# Altium PCB IMD_project.PcbDoc
Units mil, origin at the board's own origin, x right, y up, seen from the top; angles counter-clockwise.
Board outline 2362.2 x 2362.2 mil, 2 copper layers (Top Layer, Bottom Layer); 28 components, 20 nets, 83 pads, 0 vias.
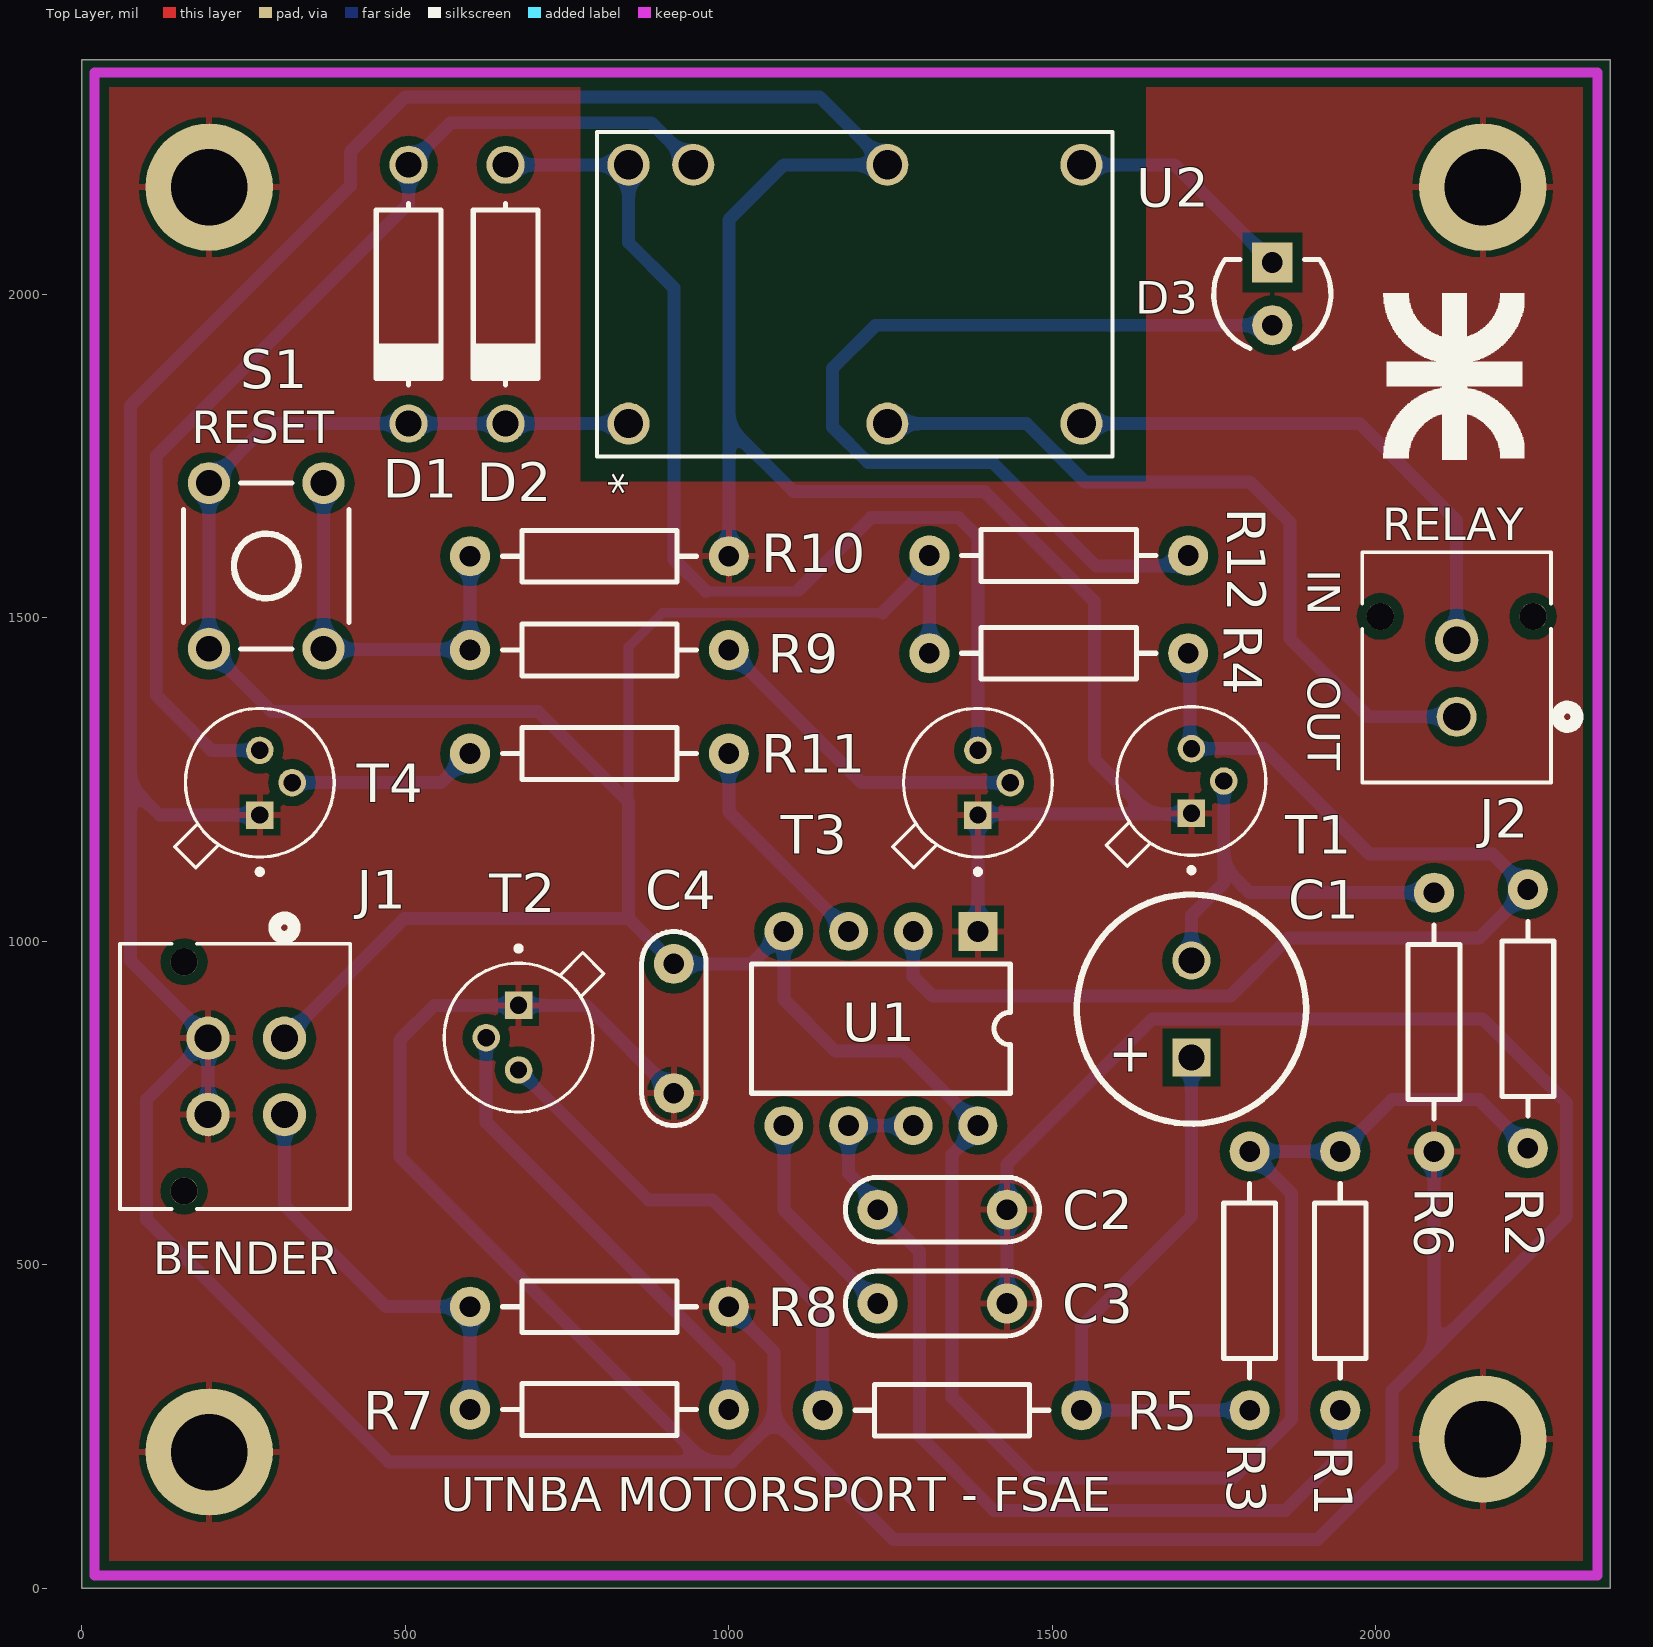
[diagram p0: Top Layer view]
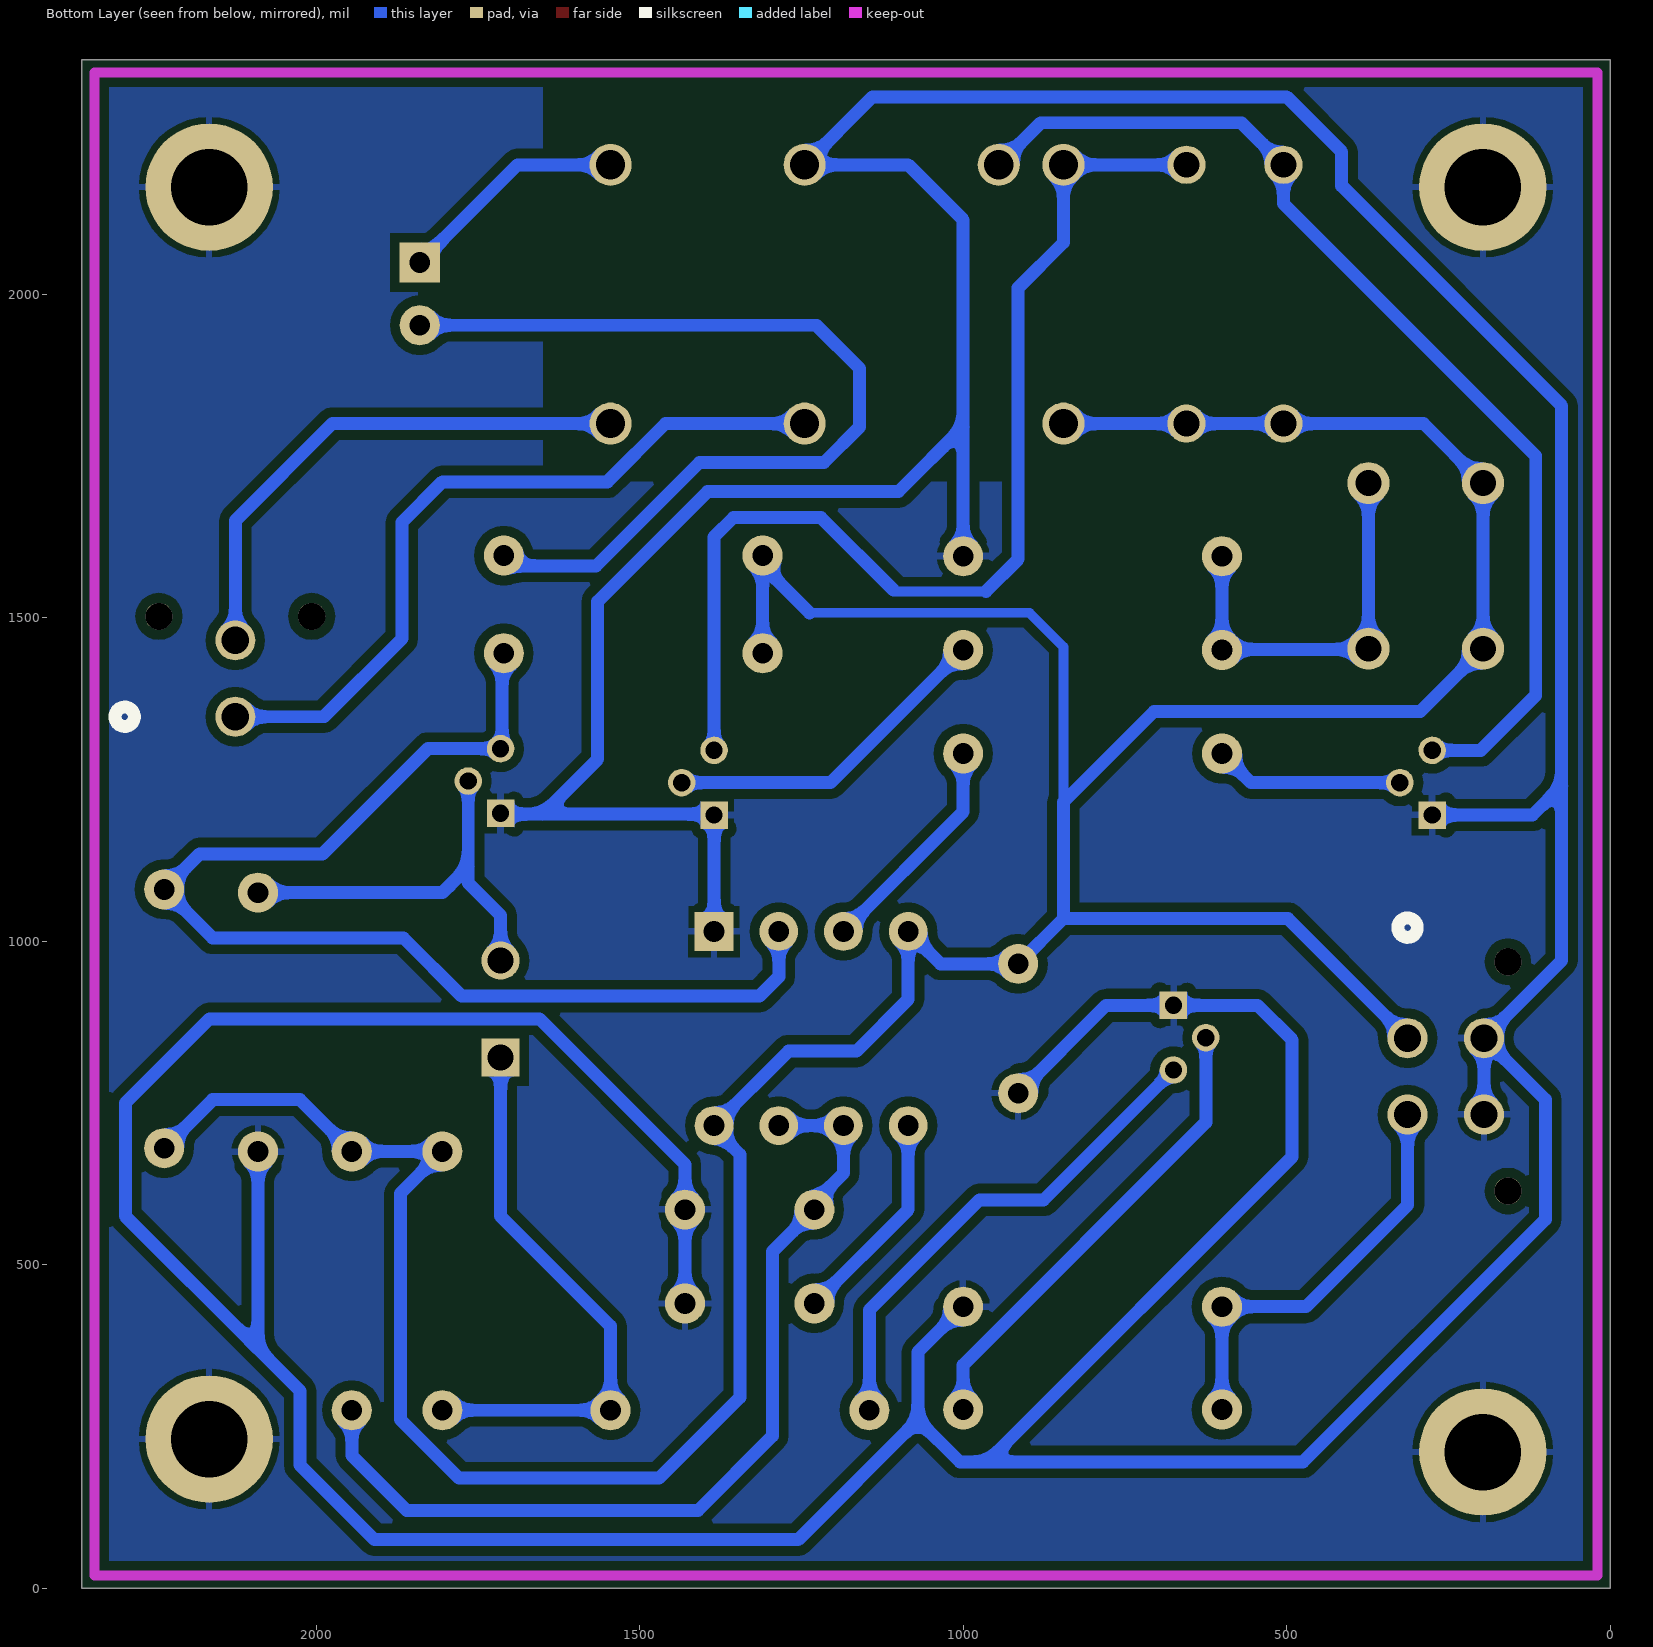
[diagram p1: Bottom Layer view, seen from below]
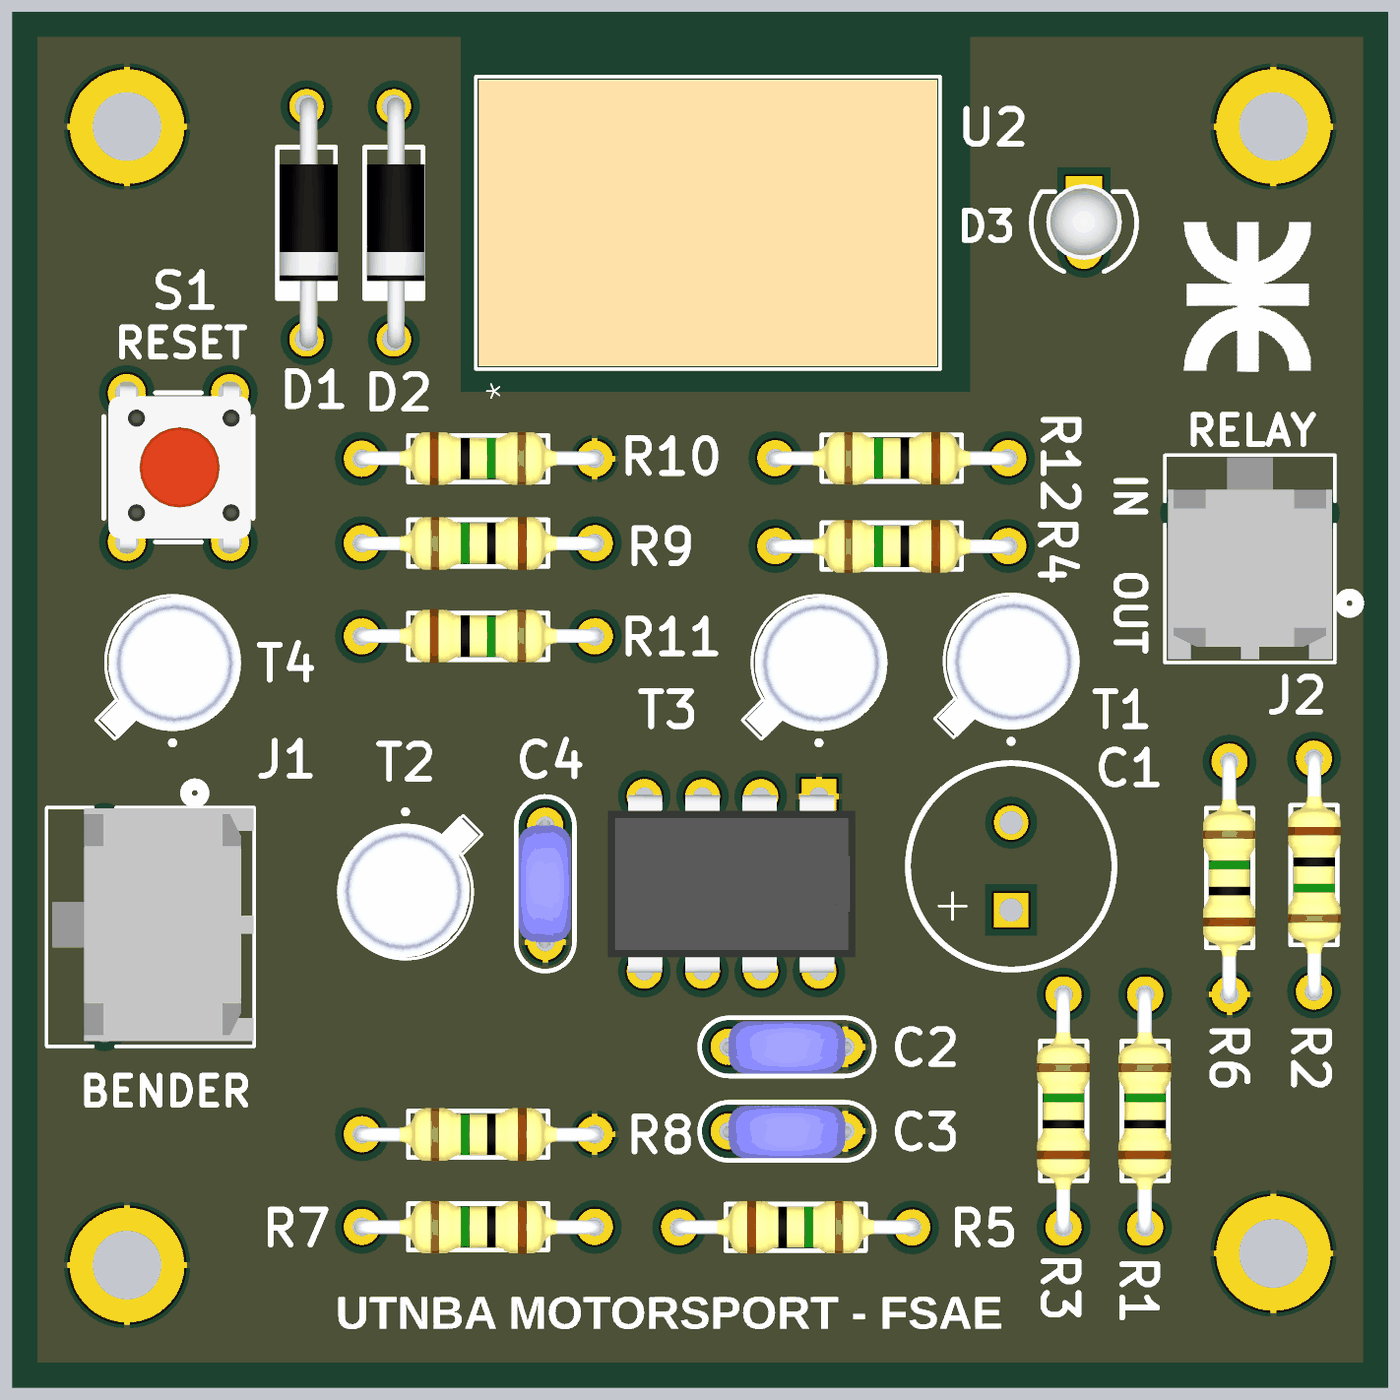
[diagram p2: 3D render of the assembled board from above, using the file's embedded part models]

## Layer stack, top to bottom
Top Solder: solder mask 0.4, Solder Resist, Dk 3.5
Top Layer: signal copper 1.4
Dielectric 1: dielectric 12.6, FR-4, Dk 4.8
Bottom Layer: signal copper 1.4
Bottom Solder: solder mask 0.4, Solder Resist, Dk 3.5

## Board outline
0,0 0,2362.2 2362.2,2362.2 2362.2,0

## Design rules (kind name [scope] priority, off if disabled: settings)
Clearance [All] p1: gap=15 ignorepadtopadclearanceinfootprint=FALSE
PolygonConnect [All] p1: connectstyle=Relief reliefconductorwidth=10 reliefentries=4 polygonreliefangle="90 Angle" airgapwidth=10
RoutingVias [All] p1: holewidth=28 width=50 viastyle="Through Hole" minholewidth=28 minwidth=50 maxholewidth=28 maxwidth=50
SolderMaskExpansion [All] p1: expansion=4 istentingtop=FALSE
Width [All] p1: maxlimit=35 minlimit=10 preferedwidth=20
30 further rules are at their usual default settings.

## Components (designator, comment, footprint, x,y, rotation, side; value= is the part's Value field where it differs from the comment)
C1 "100uF" CAP300RP 1715,895 r90 top
C2 "10uF" CAP200 1330,585 r0 top
C3 "10nF" CAP200 1330,440 r0 top
C4 "10nF" CAP200 915,865 r270 top
D1 "1N4001" DO41 505,2000 r270 top
D2 "1N4001" DO41 655,2000 r270 top
D3 "STATUS LED" "LED 3 - Red" 1840,2000 r90 top
J1 "BENDER" CONN_SD-44067-001_04_MOL 313.11,850 r90 top
J2 "RELE" CONN_SD-44067-001_02_MOL 2125,1346.89 r0 top
R1 "10K" RES400 1945,275 r90 top
R2 "1K" RES400 2235,1080 r270 top
R3 "1K" RES400 1805,275 r90 top
R4 "1K" RES400 1710,1445 r180 top
R5 "1K" RES400 1145,275 r0 top
R6 "10K" RES400 2090,675 r90 top
R7 "1K" RES400 1000,276 r180 top
R8 "2K2" RES400 1000,435 r180 top
R9 "1K" RES400 1000,1450 r180 top
R10 "10K" RES400 600,1595 r0 top
R11 "1K" RES400 600,1290 r0 top
R12 "1K" RES400 1710,1596 r180 top
S1 "TACT SWITCH" TACTSWITCH 285,1580 r0 top
T1 "2N2222" TO-18 1715,1247.5 r90 top
T2 "2N2222" TO-18 675,850.9 r270 top
T3 "2N2222" TO-18 1385,1245 r90 top
T4 "2N2222" TO-18 275,1245 r90 top
U1 "LM555" DIP8 1385,1015 r270 top
U2 "DK1A1B-L2-12V" RELAY_DK2A_L2_PAN 845,1800 r90 top

## Footprints (in the part's own frame and the unit in brackets; to place one, negate y for a bottom-side part, rotate by r counter-clockwise, add the part's x,y. Pads: shape width x height; smd on the part's side, far side on the other; paste and mask are expansions set on the pad)
CAP200 [mil]
  round 62 hole 32: 1(-100,0) 2(100,0)
  silkscreen extent -150,-50 150,50, body extent -110,-46 110,44, height 246
CAP300RP [mm]
  rect 1.5x1.5 hole 1.016: 1(-1.905,0)
  round 1.5 hole 1.016: 2(1.905,0)
  silkscreen extent -4.5,-4.5 4.5,4.5
CONN_SD-44067-001_02_MOL [mil]
  round 62 hole 42 paste-31 mask+0: 1(0,0)
  round 66.93 / inner round 62 / far side round 62 hole 42 paste-31 mask+0: 2(0,118.11)
  round 42 hole 42 unplated paste+0 mask+0: 3(-118.11,155.12) 4(118.11,155.12)
  silkscreen extent -146,-102 186,254, body extent -141,-96 141,250, height 391
CONN_SD-44067-001_04_MOL [mm]
  round 1.7 / inner round 1.575 / far side round 1.575 hole 1.067 paste-0.787 mask+0: 1(0,0) 2(-3,0) 3(0,3) 4(-3,3)
  round 1.067 hole 1.067 unplated paste+0 mask+0: 5(-6,3.94) 6(3,3.94)
  silkscreen extent -6.71,-2.59 4.72,6.46, body extent -6.47,-2.57 3.68,6.23, height 9.42
DIP8 [mil]
  rect 60x60 hole 32: 1(0,0)
  round 60 hole 32: 2(0,-100) 3(0,-200) 4(0,-300) 5(300,-300) 6(300,-200) 7(300,-100) 8(300,0)
  silkscreen extent 50,-350 250,50, body extent -3,-363 303,63, height 177
DO41 [mm]
  round 1.5 hole 1.016: 1(-5.08,0) 2(5.08,0)
  silkscreen extent -3.56,-1.27 3.56,1.27, body extent -5.46,-1.19 5.46,1.37, height 2.03
"LED 3 - Red" [mil]
  round 62 hole 32: 1(-48,0)
  rect 62x62 hole 32: 2(49,0)
  silkscreen extent -84,-90 54,90, body extent -64,-65 66,65, height 237
RELAY_DK2A_L2_PAN [mil]
  round 65 hole 45 paste-32.5 mask+0: 1(0,0) 3(0,-400) 4(0,-700) 5(400,-700) 6(400,-400) 7(400,-100) 8(400,0)
  silkscreen extent -51,-748 451,49, body extent -46,-743 446,44, height 394
RES400 [mil]
  round 62 hole 32: 1(0,0) 2(400,0)
  silkscreen extent 50,-40 350,40, body extent -12,-45 412,46, height 96
TACTSWITCH [mil]
  round 65 hole 40: 1(-88.58,-127.95) 2(-88.58,127.95) 3(88.58,-127.95) 4(88.58,127.95)
  silkscreen extent -128,-128 128,128, body extent -120,-156 124,156, height 276
TO-18 [mm]
  round 1.08 hole 0.68: 1(0,-1.27) 2(1.27,0)
  rect 1.08x1.08 / inner round 1.08 / far side rect 1.08x1.08 hole 0.68: 3(-1.27,0)
  silkscreen extent -3.6,-2.92 2.92,3.34, body extent -3.3,-2.99 2.87,3.17, height 5.31

## Part data
C1: library part CAPPOL
C2 C3 C4: library part CAP
D1 D2: "Diodo"
D3: library part "LED ROJO", "LED ROJO"
J1: library part "MolexMini 4", "Molex mini 40 de 4 pines (347920040)", Package=None, Availability=Unavailable, MP=347920040, Price=None
J2: library part "MolexMini 2", "Micro-Fit 3.0 Wire-to-Board Header, Dual Row, Vertical for up to 3.56mm Thick PCB, 2 Circuits, Tin (Sn) Plating", Manufacturer_Name="Molex Connector Corporation", Manufacturer_Part_Number=440670201, Copyright="Copyright (C) 2025 Ultra Librarian. All rights reserved.", RefDes=RefDes, Type=Type
R1 R2 R3 R4 R5 R6 R7 R8 R9 R10 R11 R12: library part RES
T1 T2 T3 T4: library part "TRANSISTOR NPN"
U1: "Timer"
U2: "Description", Manufacturer_Name=Panasonic, Copyright="Copyright (C) 2026 Ultra Librarian. All rights reserved.", Manufacturer_Part_Number=DK1A1B-L2-12V, RefDes=RefDes, Type=Type

## Free pads (board coordinates)
  round 196.85 hole 118.11: 2(196.85,210.35) 2(196.85,2165.35) 2(2165.35,230.37) 2(2165.35,2165.35)

## Nets (pads, with @x,y where several pads share a name; then routed paths per layer and width w, separated by ;. In a path a pad name is that pad's centre, name@x,y a point inside that pad or via, vN(x,y) a via of type N, cw(c..) or ccw(c..) an arc to the next point about the centre after c; other vN are vias at no path point)
GND: C2.2 C3.2 C4.2 J1.3 J1.4 pad.2 R6.1 R8.1 R10.2 T1.3 T2.3 T3.3 T4.3 U1.1 U2.6 | length 11466.4
  Bottom Layer w20: J1.4 J1.3 ; T4.3 120,1195 75,1240 ; C4.2 779.1,900.9 T2.3 545,900.9 491.56,847.45 491.56,666.56 963.11,195 ; R8.1 1070,365 1070,260 ; R10.2 1000,1795 ; U1.1 T3.3 1386.25,1196.25 1650,1196.25 ; C3.2 C2.2 1430,655 1655,880 2165,880 2295,750 2295,575 2090,370 ; T1.3 1713.75,1196.25 1650,1196.25 ; R6.1 2090,370 ; 75,1240 75,970 J1.3 ; 75,1240 75,1827.52 415,2167.52 415,2220 500,2305 1140,2305 U2.6 1085,2200 1000,2115 1000,1795 ; J1.3 100,755 100,570 475,195 963.11,195 ; 963.11,195 1005,195 1070,260 ; 1000,1795 1100,1695 1395,1695 1565,1525 1565,1281.25 1650,1196.25 ; 1070,260 1255,75 1910,75 2025,190 2025,305 2090,370
NetC1_1: C1.1 R3.1 R5.2 | length 875.4
  Bottom Layer w20: C1.1 1715,575 1545,405 R5.2 R3.1
NetC1_2: C1.2 R6.2 T1.1 | length 649.4
  Bottom Layer w20: C1.2 1715,1040 1765,1090 1765,1115 ; T1.1@1765,1250 1765,1115 ; R6.2@2085,1080 R6.2 1805,1075 1765,1115
NetC2_1: C2.1 R1.1 U1.6 U1.7 | length 1428.4
  Bottom Layer w20: U1.7 U1.6 1185,641.37 1230,596.37 C2.1 1295,520 1295,235 1410,120 1860,120 1945,205 R1.1
NetC3_1: C3.1 U1.5 | length 335.1
  Bottom Layer w20: U1.5 1085,585 C3.1
NetD1_1: D1.1 T4.2 U2.7 | length 1670.6
  Bottom Layer w20: T4.2 200,1295 115,1380 115,1750 505,2140 D1.1 570,2265 880,2265 U2.7
NetD2_1: D2.1 T3.2 U2.8 | length 1709.1
  Bottom Layer w15: 965,1540.5 1105.5,1540.5 1107.5,1542.5
  Bottom Layer w20: D2.1 U2.8 845,2080 915,2010 915,1590.5 965,1540.5 ; 1107.5,1542.5 1220,1655 1355,1655 1385,1625 T3.2
NetD3_1: D3.1 R12.1 | length 1436.8
  Bottom Layer w20: R12.1@1710,1580 1567.5,1580 1407.5,1740 1215,1740 1160,1795 1160,1885 1227,1952 D3.1
NetD3_2: D3.2 U2.5 | length 357.5
  Bottom Layer w20: U2.5 1689,2200 D3.2
NetR5_1: R5.1 T2.2 | length 778.6
  Bottom Layer w20: T2.2 875.9,600 975,600 1145,430 R5.1
NetR7_1: R7.1 T2.1 | length 730.2
  Bottom Layer w20: T2.1 625,720 1000,345 R7.1
NetR9_1: R9.1 T3.1 | length 519.9
  Bottom Layer w20: R9.1 1205,1245 T3.1
NetR9_2: R9.2 R10.1 S1.3 S1.4 | length 613.2
  Bottom Layer w20: S1.4 S1.3 374.61,1451.02 598.98,1451.02 R9.2 R10.1@600,1579 ; R10.1 R10.1@600,1596
NetR11_1: R11.1 T4.1 | length 293.6
  Bottom Layer w20: T4.1 555,1245 R11.1
OKHS: J1.2 R7.2 R8.2 | length 626.9
  Bottom Layer w20: J1.2 313.11,591.89 470,435 R8.2 R7.2@600,300
pulso: R2.1 R4.1 T1.2 U1.2 | length 1854.4
  Bottom Layer w20: U1.2 1285,945 1315,915 1775,915 1865,1005 2160,1005 R2.1 2180,1135 1990,1135 1827.5,1297.5 T1.2 ; R4.1 1712.5,1442.5 T1.2@1712.5,1302.5
rele_in: J2.2 U2.4 | length 827.1
  Bottom Layer w20: U2.4 1975,1800 2125,1650 J2.2
rele_out: J2.1 U2.3 | length 1173.1
  Bottom Layer w20: U2.3 1460,1800 1550,1710 1805,1710 1867.5,1647.5 1867.5,1467.5 1988.11,1346.89 J2.1
trigg_out: R11.2 U1.3 | length 351.6
  Bottom Layer w20: R11.2 1000,1200 U1.3
VCC: C4.1 D1.2 D2.2 J1.1 R1.2 R2.2 R3.2 R4.2 R12.2 S1.1 S1.2 U1.4 U1.8 U2.1 | length 6131.4
  Bottom Layer w15: 845,1215 845,1455 897.5,1507.5 1237.5,1507.5
  Bottom Layer w20: J1.1 498.11,1035 845,1035 ; U2.1 D2.2 D1.2 288.46,1800 S1.2 S1.1 293.46,1355 705,1355 845,1215 845,1035 ; 1237.5,1507.5 1310,1580 R4.2 ; R2.2 2160,755 2025,755 R1.2 R3.2 1870,610 1870,260.8 1779.2,170 1470,170 1345,295 1345,670.15 1385,710.15 U1.8 1270,830 1165,830 1085,910 U1.4 1035,965 C4.1 845,1035
pads on no net: J1.5 J1.6 J2.3 J2.4

## Polygon pours and split planes (outlines as drawn)
GND on Top Layer "NONET_L01_P-001" (solid, remove dead copper, pour order 4): 19.68,2342.52 22.17,2345 770,2345 770,1710 1645,1710 1645,2345 1647.48,2342.52 2342.52,2342.52 2342.52,19.68 19.68,19.68
GND on Top Layer "NONET_L01_P-001" (solid, remove dead copper, pour order 2): -165,2010
GND on Bottom Layer "NONET_L01_P-001" (solid, remove dead copper, pour order 3): 19.68,2342.52 22.17,2345 770,2345 770,1710 1650,1710 1650,2335 1645,2340 1647.52,2342.52 2342.52,2342.52 2342.52,19.68 19.68,19.68

## Keep-outs
Keep-Out Layer:
  lines w15: 19.68,19.68 19.68,2342.52 2342.52,2342.52 2342.52,19.68 19.68,19.68

## Silkscreen, mask and mechanical layers (free items; w line width, h text height)
Top Overlay:
  region: 1379 vertices and 0 holes, not listed, extent 2011.33,1744.47 2229.67,2001.15
  text "RESET" at 170,1770 h50
  text "RELAY" at 2010,1620 h50
  text "IN" at 1895,1575 h50 r270
  text "OUT" at 1895,1410 h50 r270
  text "BENDER" at 110,485 h50
  text "UTNBA MOTORSPORT - FSAE" at 555,101.08 h90
Mechanical 1:
  the board outline again, w10

## Text inside footprints (layer, text, board x,y; h text height)
C1: Top Overlay "+" at 1655,850 h60 r180
U2: Top Overlay "*" at 865,1690 h50 r90